# Altium PCB Drug Delivery CON_V113.PcbDoc (part 2 of 2)
Units mm, origin at the board's own origin, x right, y up, seen from the top; angles counter-clockwise.
Board outline 130.05 x 70.61 mm, 2 copper layers (Top Layer, Bottom Layer); 189 components, 131 nets, 618 pads, 110 vias.
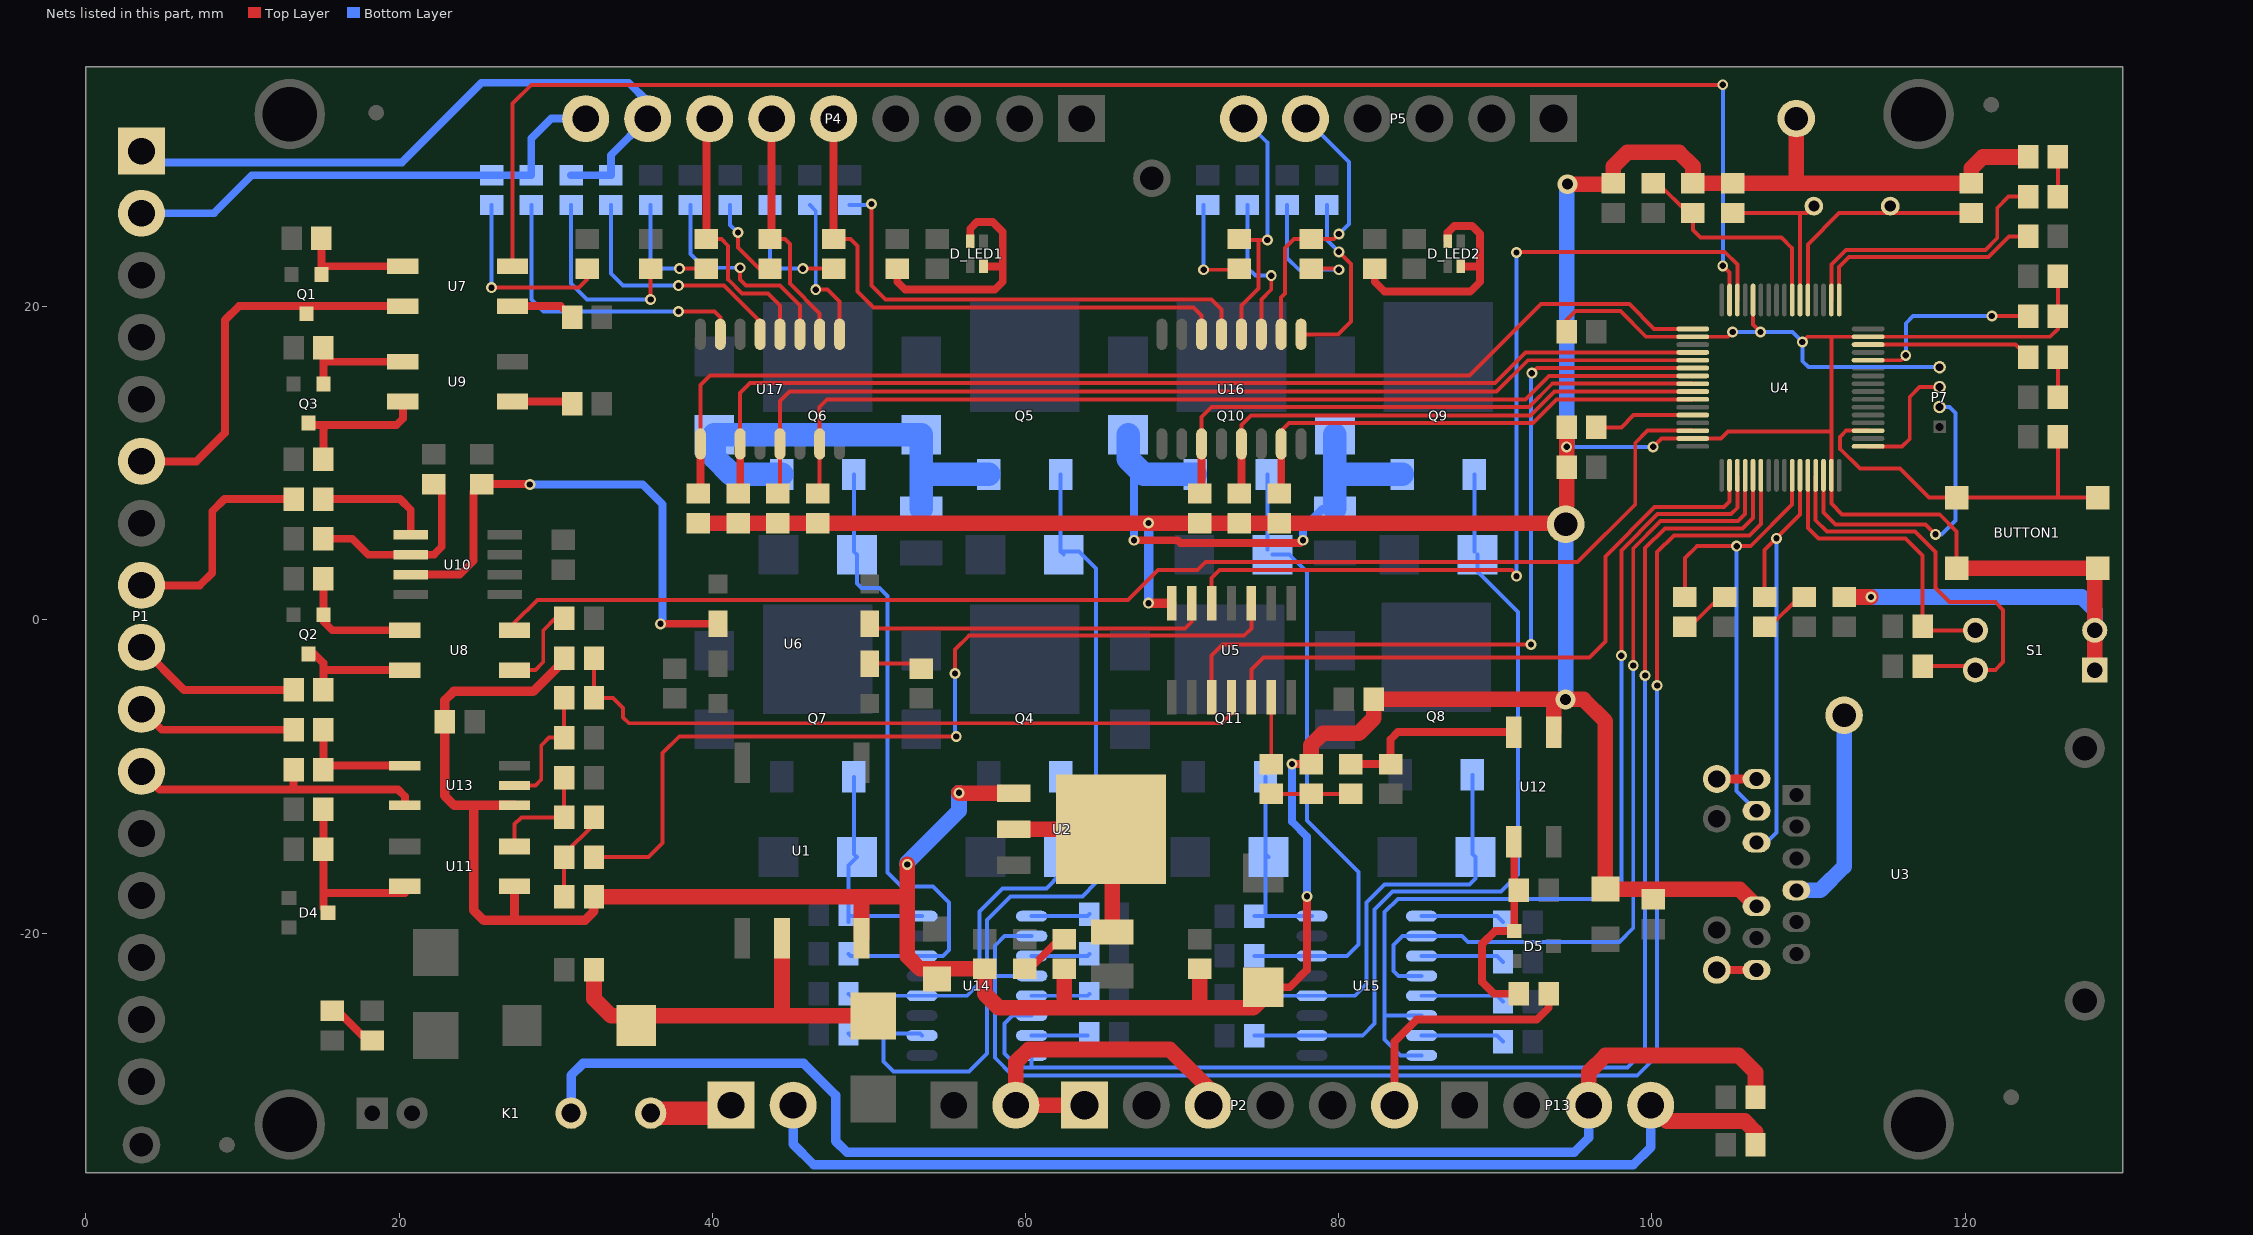
[diagram p2: the nets of this part, all layers, seen from the top]

## Via types
v1: diameter 0.7, hole 0.4, Top Layer to Bottom Layer, 89 vias
v2: diameter 1.27, hole 0.711, Top Layer to Bottom Layer, 10 vias
v3: diameter 1.27, hole 0.7, Top Layer to Bottom Layer, 9 vias
v4: diameter 3.4, hole 3.4, Top Layer to Bottom Layer, 2 vias

## Nets (pads, with @x,y where several pads share a name; then routed paths per layer and width w, separated by ;. In a path a pad name is that pad's centre, name@x,y a point inside that pad or via, vN(x,y) a via of type N, cw(c..) or ccw(c..) an arc to the next point about the centre after c; other vN are vias at no path point) (continued)
DC24V: K1.3 P13.3 R82.2 | length 89.5
  Top Layer w1: P13.3@95.96,-30.988 95.96,-28.881 97.028,-27.813 105.537,-27.813 106.614,-28.89 R82.2@106.614,-30.48
  Bottom Layer w0.6: K1.3@30.988,-31.496 30.988,-29.083 31.75,-28.321 45.847,-28.321 47.879,-30.353 47.879,-33.274 48.603,-33.998 95.034,-33.998 95.96,-33.072 P13.3@95.96,-30.988
DC24V0: P3.2 P13.4 R83.2 | length 69.2
  Top Layer w1: P13.4@99.92,-30.988 100.936,-32.004 105.918,-32.004 106.614,-32.7 R83.2@106.614,-33.528
  Bottom Layer w0.6: P3.2@45.16,-30.988 45.16,-33.476 46.482,-34.798 98.806,-34.798 99.92,-33.684 P13.4@99.92,-30.988
DOU-A: U4.35 U15.6 U15.8 | length 61.3
  Top Layer w0.254: v1(98.044,-2.286) 98.044,4.431 100.363,6.75 105.048,6.75 105.454,7.156 U4.35@105.454,9.224
  Bottom Layer w0.254: 82.931,-25.273 U15.6@85.288,-25.273 ; U15.8@85.288,-27.813 83.947,-27.813 82.931,-26.797 82.931,-18.669 83.785,-17.815 97.501,-17.815 98.044,-17.272 v1(98.044,-2.286)
DOU-B: U4.36 U15.2 U15.4 | length 54.4
  Top Layer w0.254: v1(98.806,-2.921) 98.806,4.551 100.551,6.296 105.483,6.296 105.954,6.767 U4.36@105.954,9.224
  Bottom Layer w0.254: U15.4@85.288,-22.733 83.82,-22.733 83.512,-22.425 83.512,-20.755 84.074,-20.193 87.884,-20.193 88.265,-20.574 97.917,-20.574 98.806,-19.685 v1(98.806,-2.921)
DOUSENSOR-CLOSE: LED9.2 P5.6 U16.4 | length 17
  Top Layer w0.254: LED9.2@73.66,24.318 73.721,24.257 v1(75.438,24.257) ; P5.6@73.66,31.744 P5.6@73.92,32.004 ; U16.4@73.787,18.232 73.787,20.066 74.867,21.145 74.867,24.194
  Bottom Layer w0.254: P5.6@73.92,32.004 75.438,30.486 v1(75.438,24.257)
DOUSENSOR-OPEN: LED8.2 P5.5 U16.2 | length 18.2
  Top Layer w0.254: U16.2@76.327,18.232 76.327,20.574 76.581,20.828 76.581,23.749 77.15,24.318 79.69,24.318 v1(80.01,24.638)
  Bottom Layer w0.254: P5.5@77.88,32.004 80.645,29.239 80.645,25.273 v1(80.01,24.638)
DS-CLOSE: R71.2 U4.25 U16.13 | length 33.9
  Top Layer w0.254: U16.13@73.787,11.232 73.787,12.446 74.387,13.046 92.247,13.046 93.775,14.574 U4.25@102.604,14.574
  Top Layer w0.5: R71.2@73.787,8.262 U16.13@73.787,11.232
DS-OPEN: R68.2 U4.26 U16.15 | length 33.4
  Top Layer w0.254: R68.2@76.327,8.189 76.327,12.065 76.835,12.573 92.416,12.573 93.917,14.074 U4.26@102.604,14.074
  Top Layer w0.5: 76.327,8.789 U16.15@76.327,11.232
EDM: U4.34 U5.12 | length 41.6
  Top Layer w0.254: U5.12@74.422,-4.94 74.422,-3.175 75.184,-2.413 96.012,-2.413 97.028,-1.397 97.028,4.057 100.175,7.204 104.613,7.204 104.954,7.545 U4.34@104.954,9.224
EDM-: P2.6 R41.2 | length 15.7
  Top Layer w0.5: P2.6@83.56,-30.988 83.56,-26.93 84.963,-25.527 92.644,-25.527 93.406,-24.765 R41.2@93.406,-23.876
"FEEDBACK PLUS": U4.22 U5.10 | length 51.1
  Top Layer w0.254: U5.10@71.882,-4.94 71.882,-2.286 72.59,-1.578 v1(92.275,-1.578) ; v1(92.329,15.748) 92.655,16.074 U4.22@102.604,16.074
  Bottom Layer w0.254: v1(92.275,-1.578) 92.275,15.694 v1(92.329,15.748)
GATE-A: U4.37 U14.6 U14.8 | length 88.8
  Top Layer w0.254: v1(99.568,-3.556) 99.568,4.572 100.838,5.842 105.791,5.842 106.454,6.505 U4.37@106.454,9.224
  Bottom Layer w0.254: U14.8@60.396,-27.813 60.396,-28.519 60.452,-28.575 ; U14.6@60.396,-25.273 59.182,-25.273 58.674,-25.781 58.674,-27.686 59.563,-28.575 98.425,-28.575 99.568,-27.432 v1(99.568,-3.556)
GATE-B: U4.38 U14.2 U14.4 | length 98
  Top Layer w0.254: v1(100.33,-4.191) 100.33,4.318 101.4,5.388 106.226,5.388 106.954,6.116 U4.38@106.954,9.224
  Bottom Layer w0.254: 58.039,-22.733 U14.4@60.396,-22.733 ; U14.2@60.396,-20.193 58.674,-20.193 58.039,-20.828 58.039,-27.94 59.182,-29.083 99.06,-29.083 100.33,-27.813 v1(100.33,-4.191)
GATESENSOR-CLOSE: LED6.2 P4.7 U17.4 | length 17.3
  Top Layer w0.254: LED6.2@39.624,24.318 40.579,24.318 41.021,23.876 41.021,21.717 41.91,20.828 43.561,20.828 44.323,20.066 U17.4@44.323,18.232
  Top Layer w0.5: LED6.2@39.624,24.318 39.624,31.796 P4.7@39.832,32.004
GATESENSOR-OPEN: LED7.2 P4.6 U17.2 | length 15.8
  Top Layer w0.254: LED7.2@43.688,24.318 44.643,24.318 44.958,24.003 44.958,21.463 46.863,19.558 U17.2@46.863,18.232
  Top Layer w0.5: LED7.2@43.688,24.318 43.792,24.422 P4.6@43.792,32.004
  Bottom Layer w0.5: P4.6@43.688,31.9 P4.6@43.792,32.004
GND: BUTTON1.3 BUTTON1.4 C3.2 C4.1 C5.2 C6.1 C7.2 C8.1 C9.1 C10.1 C11.1 C12.1 C13.1 C14.1 C15.1 C16.1 C19.1 C20.2 C21.2 C22.2 C23.2 LED1.2 LED4.2 P7.4 PT3.1 PT4.1 R10.1 R12.1 R62.1 R65.1 R68.1 R71.1 R74.1 R77.1 R80.1 S1.1 S1.2 U1.4 U2.1 U3.10 U4.12 U4.18 U4.31 U4.47 U4.63 U5.7 U11.3 U12.3 U13.4 | length 423.7
  Top Layer w0.254: C13.1@94.554,18.38 94.554,19.135 95.123,19.704 97.99,19.704 99.62,18.074 104.85,18.074 v1(105.156,18.38) ; v1(100.076,11.049) 100.601,11.574 104.394,11.574 104.85,12.03 111.454,12.03 ; U4.12@106.454,20.424 106.454,18.86 v1(106.934,18.38) ; v1(109.601,17.745) 109.93,18.074 125.424,18.074 125.918,18.568 C15.1@125.918,21.936 ; 111.454,17.999 111.454,7.418 112.141,6.731 118.375,6.731 119.452,5.654 BUTTON1.3@119.452,3.299
  Top Layer w0.5: C5.2@75.184,-23.462 76.868,-23.462 77.978,-22.352 v1(77.978,-17.653) ; v1(77.023,-9.21) C22.2@78.232,-9.21
  Top Layer w0.6: 24.765,-11.846 24.765,-18.542 25.4,-19.177 31.877,-19.177 32.446,-18.608 C21.2@32.446,-17.688 ; 27.305,-19.177 27.376,-19.106 U11.3@27.376,-17.018 ; U13.4@27.376,-11.846 23.53,-11.846 22.926,-11.242 22.926,-5.141 23.495,-4.572 28.575,-4.572 30.546,-2.601 C20.2@30.546,-2.448 ; v1(67.862,1.06) U5.7@69.342,1.06
  Top Layer w1: C21.2@32.446,-17.688 52.451,-17.688 ; R77.1@39.116,6.162 PT4.1@94.422,6.162 ; U1.4@49.53,-20.332 49.53,-17.688 ; v1(52.451,-15.621) 52.451,-21.463 53.274,-22.286 C4.1@57.404,-22.286 57.404,-23.876 58.293,-24.765 74.549,-24.765 75.184,-24.13 C5.2@75.184,-23.462 ; v1(55.753,-11.049) 55.774,-11.07 U2.1@59.257,-11.07 ; 62.484,-24.765 LED1.2@62.484,-22.286 ; 71.12,-24.765 C6.1@71.12,-22.286 ; C22.2@78.232,-9.21 78.232,-8.001 78.994,-7.239 81.28,-7.239 82.23,-6.289 C19.1@82.23,-5.08 95.631,-5.08 97.028,-6.477 C7.2@97.028,-17.196 105.588,-17.196 U3.10@106.68,-18.288 ; U12.3@93.726,-7.168 93.726,-5.588 ; 94.554,7.305 R12.1@94.554,12.284 ; v3(94.615,27.813) 97.475,27.813 C9.1@97.536,27.874 97.536,28.956 98.425,29.845 101.727,29.845 102.616,28.956 C16.1@102.616,27.874 C10.1@120.396,27.874 120.396,28.829 121.123,29.556 LED4.2@124.018,29.556 ; 109.22,27.874 PT3.1@109.22,32.004 ; C14.1@112.268,1.458 v1(113.98,1.458) ; BUTTON1.3@119.452,3.299 BUTTON1.4@128.452,3.299 128.27,3.117 S1.1@128.27,-3.21
  Bottom Layer w0.254: v1(94.554,11.049) v1(100.076,11.049) ; v1(105.156,18.38) 108.966,18.38 v1(109.601,17.745) 109.601,16.51 109.982,16.129 P7.4@118.364,16.129
  Bottom Layer w0.5: v1(77.023,-9.21) 77.023,-12.888 77.978,-13.843 v1(77.978,-17.653)
  Bottom Layer w0.6: v1(67.862,1.06) v1(67.862,6.179)
  Bottom Layer w1: v1(52.451,-15.621) 52.451,-15.494 55.753,-12.192 v1(55.753,-11.049) ; v3(94.488,-5.08) PT4.1@94.488,6.096 ; v1(94.554,11.049) 94.554,27.752 v3(94.615,27.813) ; v1(113.98,1.458) 127.447,1.458 128.27,0.635 S1.2@128.27,-0.67
GS-CLOSE: R62.2 U4.21 U17.13 | length 65.3
  Top Layer w0.254: R62.2@44.196,8.062 44.323,8.189 44.323,13.97 44.923,14.57 90.071,14.57 92.075,16.574 U4.21@102.604,16.574
GS-OPEN: R65.2 U4.23 U17.15 | length 62.1
  Top Layer w0.254: R65.2@46.736,8.062 46.863,8.189 U17.15@46.863,11.232 46.863,13.589 47.336,14.062 91.913,14.062 93.425,15.574 U4.23@102.604,15.574
NetBUTTON1_1: BUTTON1.1 BUTTON1.2 R5.2 U4.51 | length 24.3
  Top Layer w0.254: U4.51@113.804,12.074 112.404,12.074 112.014,11.684 112.014,10.922 113.284,9.652 115.824,9.652 117.677,7.799 BUTTON1.2@128.452,7.799 ; 125.918,7.86 R5.2@125.918,11.684
NetC1_1: C1.1 C2.1 D1.2 U1.2 | length 25.1
  Top Layer w1: C2.1@32.446,-22.352 32.446,-24.191 33.545,-25.29 D1.2@50.292,-25.29 ; 44.45,-25.29 U1.2@44.45,-20.332
NetC20_1: C20.1 R30.1 U5.11 | length 45.6
  Top Layer w0.254: C20.1@32.446,-2.448 R30.1@32.446,-4.988 33.655,-4.988 34.29,-5.623 34.29,-6.223 34.671,-6.604 72.517,-6.604 73.152,-5.969 U5.11@73.152,-4.94
NetC21_1: C21.1 R28.2 R31.1 | length 5.9
  Top Layer w0.254: C21.1@30.546,-17.688 30.546,-14.955 32.446,-13.055 R31.1@32.446,-12.608
NetC22_1: C22.1 R29.2 R32.1 | length 5.1
  Top Layer w0.254: R29.2@75.692,-11.11 R32.1@80.772,-11.11
NetD3_2: D3.2 U4.1 | length 15
  Top Layer w0.254: U4.1@111.954,20.424 111.954,22.539 112.583,23.168 121.501,23.168 122.809,24.476 D3.2@124.018,24.476
NetD4_3: D4.3 R37.2 R40.1 U11.2 | length 11.9
  Top Layer w0.5: 15.174,-17.434 U11.2@20.376,-17.434 ; R40.1@15.174,-12.1 15.174,-18.404 D4.3@15.474,-18.704
NetD5_1: D5.1 R38.1 R41.1 U12.1 | length 13.2
  Top Layer w0.5: U12.1@91.186,-14.168 91.206,-14.188 D5.1@91.206,-19.878 89.977,-19.878 89.154,-20.701 89.154,-23.114 89.916,-23.876 R41.1@91.506,-23.876
NetD6_2: D6.2 D8.2 F2.1 Q5.3 Q6.3 | length 28.5
  Bottom Layer w1.5: Q6.3@44.436,9.284 41.227,9.284 40.132,10.379 D8.2@40.132,11.816 D6.2@53.34,11.816 F2.1@53.34,7.08 ; 53.34,9.236 53.388,9.284 Q5.3@57.644,9.284
NetD10_2: D10.2 D12.2 F3.1 Q9.3 Q10.3 | length 34.9
  Top Layer w0.5: v1(66.929,5.08) 69.723,5.08 69.908,4.895 77.539,4.895 v1(77.724,5.08)
  Bottom Layer w0.5: D12.2@66.548,11.816 D12.2@66.929,11.435 ; v1(66.929,5.08) 66.929,9.871 ; v1(77.724,5.08) 77.724,5.842 78.962,7.08 F3.1@79.756,7.08
  Bottom Layer w1.5: D12.2@66.548,11.816 66.548,10.287 67.551,9.284 Q10.3@70.852,9.284 ; F3.1@79.756,7.08 D10.2@79.756,11.816 ; 79.756,9.236 79.804,9.284 Q9.3@84.06,9.284
NetD_LED1_2: D_LED1.2 D_LED1.4 R46.2 | length 15.7
  Top Layer w0.5: R46.2@51.816,22.418 51.816,21.59 52.324,21.082 58.039,21.082 58.547,21.59 58.547,24.765 57.912,25.4 56.896,25.4 56.471,24.975 D_LED1.4@56.471,24.168 ; D_LED1.2@57.321,22.568 58.509,22.568
NetD_LED2_2: D_LED2.2 D_LED2.4 R55.2 | length 15.3
  Top Layer w0.5: R55.2@82.296,22.418 82.296,21.59 82.931,20.955 88.392,20.955 89.027,21.59 89.027,24.638 88.519,25.146 87.376,25.146 86.951,24.721 D_LED2.4@86.951,24.168 ; D_LED2.2@87.801,22.568 88.938,22.568
NetF1_1: F1.1 pad.1 U2.2 U2.4 | length 12.8
  Top Layer w1: U2.2@59.257,-13.37 U2.4@65.457,-13.37 65.532,-13.445 F1.1@65.532,-19.936
NetK1_4: K1.4 P3.1 | length 5.3
  Top Layer w1.5: K1.4@36.068,-31.496 40.692,-31.496 P3.1@41.2,-30.988
NetLED1_1: LED1.1 R1.2 | length 3.3
  Top Layer w0.5: R1.2@59.944,-22.286 60.264,-22.286 62.164,-20.386 LED1.1@62.484,-20.386
NetLED2_1: LED2.1 R2.1 | length 3.3
  Top Layer w0.254: LED2.1@102.108,-0.442 102.428,-0.442 104.328,1.458 R2.1@104.648,1.458
NetLED3_1: LED3.1 R3.1 | length 3.3
  Top Layer w0.254: LED3.1@107.188,-0.442 107.508,-0.442 109.408,1.458 R3.1@109.728,1.458
NetLED4_1: LED4.1 R11.1 | length 2.5
  Top Layer w0.254: R11.1@125.918,27.016 LED4.1@125.918,29.556
NetLED5_1: LED5.1 R78.1 | length 7.8
  Top Layer w0.254: v1(45.786,22.418) LED5.1@47.752,22.418
  Bottom Layer w0.254: R78.1@43.688,26.482 43.688,22.987 44.257,22.418 v1(45.786,22.418)
NetLED6_1: LED6.1 R60.2 | length 7.3
  Top Layer w0.254: v1(37.907,22.418) LED6.1@39.624,22.418
  Bottom Layer w0.254: R60.2@36.068,26.482 36.068,22.987 36.637,22.418 v1(37.907,22.418)
NetLED7_1: LED7.1 R63.2 | length 5.5
  Top Layer w0.254: v1(41.641,24.724) 41.641,23.764 42.987,22.418 LED7.1@43.688,22.418
  Bottom Layer w0.254: R63.2@41.148,26.482 41.148,25.217 v1(41.641,24.724)
NetLED8_1: LED8.1 R66.2 | length 8.8
  Top Layer w0.254: LED8.1@78.232,22.418 79.944,22.418 v1(80.01,22.352)
  Bottom Layer w0.254: R66.2@76.708,26.482 76.708,23.114 77.47,22.352 v1(80.01,22.352)
NetLED9_1: LED9.1 R69.2 | length 6.4
  Top Layer w0.254: v1(71.374,22.352) 73.594,22.352 LED9.1@73.66,22.418
  Bottom Layer w0.254: v1(71.374,22.352) R69.2@71.374,26.482
NetLED10_1: LED10.1 R72.2 | length 12.5
  Top Layer w0.254: v1(36.068,20.447) LED10.1@36.068,22.418
  Bottom Layer w0.254: R72.2@30.988,26.482 30.988,21.463 32.004,20.447 v1(36.068,20.447)
NetLED11_1: LED11.1 R75.2 | length 12.3
  Top Layer w0.254: v1(25.908,21.209) 31.496,21.209 32.004,21.717 LED11.1@32.004,22.418 ; LED11.1@31.877,22.418 LED11.1@31.877,22.479
  Bottom Layer w0.254: v1(25.908,21.209) R75.2@25.908,26.482
NetLED12_1: LED12.1 R81.2 | length 3.3
  Top Layer w0.5: LED12.1@15.748,-24.958 16.068,-24.958 17.968,-26.858 R81.2@18.288,-26.858
NetLED13_1: LED13.1 R4.2 | length 2.5
  Top Layer w0.254: R4.2@125.918,14.224 LED13.1@125.918,16.764
NetLED13_2: LED13.2 U4.62 | length 10.5
  Top Layer w0.254: U4.62@113.804,17.574 123.208,17.574 LED13.2@124.018,16.764
NetPT5_1: PT5.1 U3.4 | length 13.3
  Bottom Layer w1: U3.4@109.22,-17.272 110.744,-17.272 112.268,-15.748 PT5.1@112.268,-6.096
NetQ1_1: Q1.1 R19.2 U7.3 | length 7.5
  Top Layer w0.5: Q1.1@15.047,22.043 R19.2@15.047,24.349 ; 15.047,22.571 U7.3@20.249,22.571
NetQ2_1: Q2.1 R20.1 U8.3 | length 8.2
  Top Layer w0.5: R20.1@15.174,2.632 15.174,-0.096 15.748,-0.67 U8.3@20.376,-0.67
NetQ2_3: Q2.3 R23.1 U8.4 | length 8.2
  Top Layer w0.5: Q2.3@14.224,-2.174 14.585,-2.174 15.174,-2.763 R23.1@15.174,-4.48 ; 15.174,-3.083 15.301,-3.21 U8.4@20.376,-3.21
NetQ3_1: Q3.1 R21.1 U9.3 | length 7.5
  Top Layer w0.5: Q3.1@15.047,14.931 Q3.1@15.047,15.058 ; Q3.1@15.174,15.058 R21.1@15.174,17.364 ; 15.174,16.475 U9.3@20.249,16.475
NetQ3_3: Q3.3 R24.1 U9.4 | length 9.8
  Top Layer w0.5: Q3.3@14.097,12.431 19.832,12.431 20.249,12.848 U9.4@20.249,13.935 ; R24.1@15.047,10.125 R24.1@15.047,10.252 ; R24.1@15.174,10.252 15.174,12.238 15.367,12.431
NetQ4_1: Q4.1 R45.1 U14.12 Z2.2 | length 25.7
  Bottom Layer w0.254: R45.1@48.702,-23.876 48.829,-24.003 56.261,-24.003 57.077,-23.187 57.077,-18.615 58.547,-17.145 61.341,-17.145 62.244,-16.242 Q4.1@62.244,-10.02
NetQ5_1: Q5.1 R44.1 U14.10 Z1.1 | length 58.5
  Bottom Layer w0.254: R44.1@48.829,-26.543 R44.1@48.702,-26.416 53.269,-26.416 U14.10@53.396,-26.543 ; 50.927,-26.416 50.927,-28.194 51.562,-28.829 56.388,-28.829 57.531,-27.686 57.531,-19.177 59.055,-17.653 63.627,-17.653 64.516,-16.764 64.516,3.267 63.427,4.356 Z1.1@62.244,4.356 ; Q5.1@62.244,9.284 Z1.1@62.244,4.356 ; Z1.1@62.444,4.156 Z1.1@62.244,4.356
NetQ6_1: Q6.1 R47.1 U14.14 Z3.1 | length 41.4
  Bottom Layer w0.254: R47.1@48.702,-21.336 48.829,-21.463 U14.14@53.396,-21.463 54.737,-21.463 55.118,-21.082 55.118,-18.034 54.102,-17.018 52.07,-17.018 51.181,-16.129 51.181,1.524 50.673,2.032 49.53,2.032 49.236,2.326 Z3.1@49.236,4.156 49.036,4.356 Q6.1@49.036,9.284
NetQ7_1: Q7.1 R48.1 U14.16 Z4.2 | length 14.2
  Bottom Layer w0.254: R48.1@48.702,-19.304 R48.1@48.702,-18.923 ; Q7.1@49.036,-10.02 49.036,-14.948 Z4.2@49.236,-15.148 48.702,-15.682 R48.1@48.702,-18.796 48.829,-18.923 U14.16@53.396,-18.923
NetQ8_1: Q8.1 R54.1 U15.12 Z6.2 | length 27
  Bottom Layer w0.254: R54.1@74.61,-24.003 81.026,-24.003 81.788,-23.241 81.788,-18.034 82.931,-16.891 88.352,-16.891 88.733,-16.51 Z6.2@88.733,-15.148 88.533,-14.948 Q8.1@88.533,-9.893
NetQ9_1: Q9.1 R53.1 U15.10 Z5.1 | length 51.8
  Bottom Layer w0.254: R53.1@74.61,-26.543 81.534,-26.543 82.296,-25.781 82.296,-18.488 83.439,-17.345 90.351,-17.345 91.44,-16.256 91.44,0.508 88.86,3.088 Z5.1@88.86,4.156 ; Z5.1@88.66,4.356 Q9.1@88.66,9.284
NetQ10_1: Q10.1 R56.1 U15.14 Z7.1 | length 39.5
  Bottom Layer w0.254: R56.1@74.61,-21.463 80.518,-21.463 81.261,-20.72 81.261,-16.11 77.978,-12.827 77.978,3.048 76.87,4.156 Z7.1@75.779,4.156 ; Z7.1@75.452,4.483 Q10.1@75.452,9.284
NetQ11_1: Q11.1 R57.1 U15.16 Z8.2 | length 12.8
  Bottom Layer w0.254: R57.1@74.61,-18.923 U15.16@78.288,-18.923 ; 75.325,-18.81 Q11.1@75.325,-10.02 ; Z8.2@75.325,-14.948 Z8.2@75.525,-15.148
NetR10_2: R10.2 U4.60 | length 12.6
  Top Layer w0.254: U4.60@113.804,16.574 115.888,16.574 v1(116.205,16.891) ; v1(121.701,19.396) R10.2@124.018,19.396
  Bottom Layer w0.254: v1(116.205,16.891) 116.205,18.923 116.678,19.396 v1(121.701,19.396)
NetR11_2: R11.2 U4.2 | length 17.7
  Top Layer w0.254: U4.2@111.454,20.424 111.454,22.681 112.395,23.622 121.285,23.622 122.047,24.384 122.047,26.289 122.774,27.016 R11.2@124.018,27.016
NetR12_2: R12.2 U4.28 | length 6.5
  Top Layer w0.254: R12.2@96.454,12.284 98.044,12.284 98.834,13.074 U4.28@102.604,13.074
NetR13_2: R13.2 S1.3 U4.45 | length 27.3
  Top Layer w0.254: U4.45@110.454,9.224 110.454,6.358 111.17,5.642 116.786,5.642 118.11,4.318 118.11,2.032 118.999,1.143 121.92,1.143 122.428,0.635 122.428,-2.702 121.92,-3.21 S1.3@120.65,-3.21 120.396,-2.956 R13.2@117.282,-2.956
NetR14_2: R14.2 S1.4 U4.44 | length 19.6
  Top Layer w0.254: U4.44@109.954,9.224 109.954,5.87 110.636,5.188 116.189,5.188 117.282,4.095 117.282,-0.67 S1.4@120.65,-0.67
NetR15_1: R15.1 U7.1 | length 4.1
  Top Layer w0.5: U7.1@27.249,20.031 30.327,20.031 R15.1@31.054,19.304
NetR16_2: R16.2 U6.2 | length 3.4
  Top Layer w0.254: U6.2@50.062,-2.794 53.02,-2.794 R16.2@53.34,-3.114
NetR17_2: R17.2 U8.1 | length 5.7
  Top Layer w0.254: U8.1@27.376,-3.21 28.702,-3.21 29.21,-2.702 29.21,-0.67 29.972,0.092 R17.2@30.546,0.092
NetR18_2: R18.2 U9.1 | length 3.9
  Top Layer w0.5: U9.1@27.249,13.935 30.927,13.935 R18.2@31.054,13.808
NetR22_2: R22.2 U6.6 U10.3 | length 32.9
  Top Layer w0.5: U10.3@20.749,2.886 23.876,2.886 24.765,3.775 24.765,8.159 R22.2@25.273,8.667 28.321,8.667 v1(28.352,8.636) ; v1(36.703,-0.254) U6.6@40.362,-0.254
  Bottom Layer w0.5: v1(28.352,8.636) 35.56,8.636 36.83,7.366 36.83,-0.127 v1(36.703,-0.254)
NetR25_1: R25.1 R26.2 U10.2 | length 12.4
  Top Layer w0.5: R26.2@15.174,5.172 17.018,5.172 18.034,4.156 22.225,4.156 22.733,4.664 22.733,8.159 R25.1@22.225,8.667
NetR27_1: R27.1 U10.1 | length 7.5
  Top Layer w0.5: R27.1@15.174,7.712 20.066,7.712 20.749,7.029 U10.1@20.749,5.426
NetR28_1: R28.1 U5.3 | length 56.4
  Top Layer w0.254: R28.1@32.446,-15.148 35.941,-15.148 36.83,-14.259 36.83,-8.509 37.893,-7.446 v1(55.579,-7.446) ; v1(55.499,-3.429) 55.499,-1.905 56.388,-1.016 73.949,-1.016 74.422,-0.543 U5.3@74.422,1.06
  Bottom Layer w0.254: v1(55.499,-3.429) 55.499,-7.366 v1(55.579,-7.446)
NetR29_1: R29.1 U5.13 | length 4.3
  Top Layer w0.254: R29.1@75.692,-9.21 U5.13@75.692,-4.94
NetR30_2: R30.2 R33.2 U13.5 | length 8.2
  Top Layer w0.254: U13.5@27.376,-10.576 28.702,-10.576 29.083,-10.195 29.083,-8.036 29.591,-7.528 R33.2@30.546,-7.528 R30.2@30.546,-4.988
NetR31_2: R31.2 R34.2 U11.4 | length 7.3
  Top Layer w0.254: U11.4@27.376,-14.478 27.376,-13.045 27.813,-12.608 R31.2@30.546,-12.608 R34.2@30.546,-10.068
NetR32_2: R32.2 R35.2 U12.4 | length 12.6
  Top Layer w0.5: R32.2@80.772,-9.21 R35.2@83.312,-9.21 83.312,-7.62 83.764,-7.168 U12.4@91.186,-7.168 91.186,-7.208 U12.4@90.932,-6.954
NetR36_1: R36.1 R39.1 U13.1 | length 7.7
  Top Layer w0.5: R36.1@15.174,-9.56 R39.1@15.174,-7.02 ; R36.1@15.174,-9.306 U13.1@20.376,-9.306
NetR42_2: R42.2 U14.7 | length 3.6
  Bottom Layer w0.254: U14.7@60.396,-26.543 R42.2@63.947,-26.543
NetR43_2: R43.2 U14.5 | length 3.7
  Bottom Layer w0.254: U14.5@60.396,-24.003 63.947,-24.003 R43.2@64.074,-23.876
NetR49_1: R49.1 U14.3 | length 3.7
  Bottom Layer w0.254: U14.3@60.396,-21.463 63.947,-21.463 R49.1@64.074,-21.336
NetR50_1: R50.1 U14.1 | length 3.7
  Bottom Layer w0.254: U14.1@60.396,-18.923 63.947,-18.923 R50.1@64.074,-18.796
NetR51_2: R51.2 U15.7 | length 5.4
  Bottom Layer w0.254: U15.7@85.288,-26.543 90.109,-26.543 R51.2@90.49,-26.924
NetR52_1: R52.1 U15.5 | length 5.4
  Bottom Layer w0.254: U15.5@85.288,-24.003 90.109,-24.003 R52.1@90.49,-24.384
NetR58_2: R58.2 U15.3 | length 5.4
  Bottom Layer w0.254: U15.3@85.288,-21.463 90.109,-21.463 R58.2@90.49,-21.844
NetR59_1: R59.1 U15.1 | length 5.4
  Bottom Layer w0.254: U15.1@85.288,-18.923 90.109,-18.923 R59.1@90.49,-19.304
NetR61_2: R61.2 U17.3 | length 13.7
  Top Layer w0.254: v1(41.783,22.479) 41.783,21.717 42.164,21.336 44.323,21.336 45.593,20.066 U17.3@45.593,18.232
  Bottom Layer w0.254: R61.2@38.608,26.482 38.608,23.368 39.497,22.479 v1(41.783,22.479)
NetR64_2: R64.2 U17.1 | length 9.5
  Top Layer w0.254: v1(46.609,21.082) 47.371,21.082 48.133,20.32 U17.1@48.133,18.232
  Bottom Layer w0.254: R64.2@46.228,26.482 46.609,26.101 v1(46.609,21.082)
NetR67_2: R67.2 U16.1 | length 11.6
  Top Layer w0.254: U16.1@77.597,18.232 79.954,18.232 80.772,19.05 80.772,22.733 v1(80.01,23.495)
  Bottom Layer w0.254: R67.2@79.248,26.482 79.248,24.257 v1(80.01,23.495)
NetR70_2: R70.2 U16.3 | length 9.7
  Top Layer w0.254: U16.3@75.057,18.232 75.057,20.444 75.692,21.079 v1(75.692,21.971)
  Bottom Layer w0.254: R70.2@74.168,26.482 74.168,22.479 74.676,21.971 v1(75.692,21.971)
NetR73_1: R73.1 U17.5 | length 16
  Top Layer w0.254: v1(37.846,21.336) 40.76,21.336 43.053,19.043 U17.5@43.053,18.232
  Bottom Layer w0.254: R73.1@33.528,26.482 33.528,22.098 34.29,21.336 v1(37.846,21.336)
NetR76_1: R76.1 U17.7 | length 19.6
  Top Layer w0.254: v1(37.846,19.685) 40.132,19.685 40.513,19.304 U17.7@40.513,18.232
  Bottom Layer w0.254: R76.1@28.448,26.482 28.448,20.447 29.21,19.685 v1(37.846,19.685)
NetR79_2: R79.2 U16.5 | length 31.2
  Top Layer w0.254: v1(50.165,26.543) 50.165,21.336 51.054,20.447 71.882,20.447 72.517,19.812 U16.5@72.517,18.232
  Bottom Layer w0.254: R79.2@48.768,26.482 50.104,26.482 v1(50.165,26.543)
NetU3_7: U3.7 U3.13 | length 2.5
  Top Layer w0.6: U3.13@104.14,-10.16 U3.7@106.68,-10.16
NetU3_12: U3.12 U3.16 | length 2.5
  Top Layer w0.5: U3.16@104.14,-22.352 U3.12@106.68,-22.352
NetU5_6: U5.6 U6.3 | length 22
  Top Layer w0.254: U6.3@50.062,-0.254 50.165,-0.254 50.473,-0.562 70.177,-0.562 70.612,-0.127 U5.6@70.612,1.06
OA+: P1.10 R39.2 | length 10.3
  Top Layer w0.5: P1.10@3.556,-5.721 4.855,-7.02 R39.2@13.274,-7.02
OA-: P1.11 R36.2 U13.3 | length 19.4
  Top Layer w0.5: P1.11@3.556,-9.681 4.705,-10.83 19.939,-10.83 20.376,-11.267 U13.3@20.376,-11.846 ; 13.208,-10.83 13.274,-10.764 R36.2@13.274,-9.56
OPPOSITE: R80.2 U4.24 U16.11 | length 37.2
  Top Layer w0.254: U16.11@71.247,11.176 71.247,12.954 71.882,13.589 92.148,13.589 93.633,15.074 U4.24@102.604,15.074
  Top Layer w0.5: R80.2@71.12,8.062 71.247,8.189 U16.11@71.247,11.232
OPPOSITESENSOR: LED5.2 P4.5 U16.6 | length 36.1
  Top Layer w0.254: LED5.2@47.752,24.318 48.834,24.318 49.276,23.876 49.276,20.955 50.292,19.939 70.739,19.939 71.247,19.431 U16.6@71.247,18.232
  Top Layer w0.5: LED5.2@47.752,24.318 P4.5@47.752,32.004
OSCIN1: C10.2 U4.5 Y1.1 | length 14.8
  Top Layer w0.254: U4.5@109.954,20.424 109.954,23.975 111.953,25.974 C10.2@120.396,25.974
OSCOUT1: C11.2 U4.6 Y1.2 | length 10.9
  Top Layer w0.254: C11.2@105.156,25.974 109.894,25.974 Y1.2@110.336,26.416 ; U4.6@109.454,20.424 109.454,25.954
PULS: U4.14 U5.5 | length 58.9
  Top Layer w0.254: U5.5@71.882,1.06 71.882,2.667 72.39,3.175 91.059,3.175 v1(91.35,2.787) ; v1(91.35,23.458) 91.387,23.495 104.648,23.495 105.454,22.689 U4.14@105.454,20.424
  Bottom Layer w0.254: v1(91.35,2.787) v1(91.35,23.458)
PULS2: P1.8 R27.2 | length 14.3
  Top Layer w0.5: P1.8@3.556,2.199 7.279,2.199 8.075,2.995 8.075,6.932 8.855,7.712 R27.2@13.274,7.712
RESET: C16.2 R9.2 U4.7 | length 14.5
  Top Layer w0.254: R9.2@100.076,27.874 100.396,27.874 102.296,25.974 C16.2@102.616,25.974 102.616,24.892 103.105,24.403 108.277,24.403 108.954,23.726 U4.7@108.954,20.424
RESETSENSOR: P1.2 P4.9 R75.1 R76.2 | length 32.2
  Bottom Layer w0.5: P1.2@3.556,25.959 8.179,25.959 10.602,28.382 R76.2@28.448,28.382 28.448,30.734 29.718,32.004 P4.9@31.912,32.004
RST: R77.2 U4.17 U17.9 | length 73.1
  Top Layer w0.254: U17.9@39.243,11.832 39.243,14.986 39.843,15.586 88.357,15.586 92.929,20.158 98.552,20.158 100.136,18.574 U4.17@102.604,18.574
  Top Layer w0.5: R77.2@39.116,8.062 39.243,8.189 U17.9@39.243,11.832
SF1+: P2.1 P2.3 P6.2 | length 22.8
  Top Layer w0.5: P2.3@71.247,-30.988 P2.3@71.68,-30.988
  Top Layer w1: P2.1@63.76,-30.988 P6.2@59.384,-30.988 59.384,-28.246 60.198,-27.432 69.215,-27.432 71.68,-29.897 P2.3@71.68,-30.988
  Bottom Layer w1: P6.2@59.384,-30.988 P6.2@59.384,-30.455
SIGN: U4.30 U8.2 | length 83.1
  Top Layer w0.254: U8.2@27.376,-0.67 27.376,-0.183 28.829,1.27 66.548,1.27 68.453,3.175 70.993,3.175 71.501,3.683 95.25,3.683 98.933,7.366 98.933,11.303 99.704,12.074 U4.30@102.604,12.074
SIGN2: P1.9 R23.2 | length 10.8
  Top Layer w0.5: P1.9@3.556,-1.761 6.275,-4.48 R23.2@13.274,-4.48
SON: U4.15 U7.2 | length 102.1
  Top Layer w0.254: U7.2@27.249,22.571 27.249,32.964 28.448,34.163 v1(104.521,34.163) ; v1(104.521,22.606) 104.954,22.173 U4.15@104.954,20.424
  Bottom Layer w0.254: v1(104.521,22.606) v1(104.521,34.163)
SRV-ON: P1.6 Q1.3 U7.4 | length 25
  Top Layer w0.5: P1.6@3.556,10.119 7.071,10.119 8.89,11.938 8.89,19.142 9.779,20.031 U7.4@20.249,20.031
TCK/SWCLK: P7.3 U4.49 | length 7.7
  Top Layer w0.254: U4.49@113.804,11.074 115.976,11.074 116.459,11.557 116.459,14.224 117.094,14.859 P7.3@118.364,14.859
TMS/SWDIO: P7.2 U4.46 | length 19.8
  Top Layer w0.254: U4.46@110.954,9.224 110.954,6.858 111.716,6.096 117.475,6.096 v1(118.11,5.461)
  Bottom Layer w0.254: v1(118.11,5.461) 118.491,5.461 119.38,6.35 119.38,13.208 118.999,13.589 P7.2@118.364,13.589
TOP: R74.2 U4.20 U17.11 | length 68.4
  Top Layer w0.254: U17.11@41.783,11.832 41.783,14.478 42.418,15.113 89.972,15.113 91.933,17.074 U4.20@102.604,17.074
  Top Layer w0.5: R74.2@41.656,8.062 41.783,8.189 U17.11@41.783,11.832
TOPSENSOR: P1.1 P4.8 R72.1 R73.2 | length 43.4
  Bottom Layer w0.5: P1.1@3.556,29.919 4.265,29.21 20.193,29.21 25.273,34.29 34.671,34.29 35.872,33.089 P4.8@35.872,32.004 33.528,29.66 R73.2@33.528,28.382 R72.1@30.988,28.382
USART_RX1: LED3.2 U3.9 U4.43 | length 29
  Top Layer w0.254: LED3.2@107.188,1.458 107.188,4.445 109.454,6.711 U4.43@109.454,9.224
  Bottom Layer w0.254: U3.9@106.68,-14.224 107.315,-14.224 107.95,-13.589 v1(107.95,5.207)
USART_TX1: LED2.2 U3.8 U4.42 | length 30
  Top Layer w0.254: LED2.2@102.108,1.458 102.108,3.937 102.87,4.699 106.299,4.699 108.954,7.354 U4.42@108.954,9.224
  Bottom Layer w0.254: v1(105.41,4.699) 105.41,-10.922 U3.8@106.68,-12.192
pads on no net: D4.2 D5.2 U1.8 U3.1 U3.2 U3.3 U3.5 U3.6 U3.17 U4.3 U4.4 U4.8 U4.9 U4.10 U4.11 U4.27 U4.29 U4.39 U4.40 U4.41 U4.50 U4.52 U4.53 U4.54 U4.55 U4.56 U4.57 U4.58 U4.59 U4.61 U5.1 U5.2 U5.8 U5.9 U6.1 U6.4 U10.7 U16.7 U16.8 U16.9 U16.10
copper on no net:
  other v4: 124.46,-22.606 124.46,-9.906

## Polygon pours and split planes (outlines as drawn)
24V0 on Bottom Layer "GND" (solid, remove dead copper, pour order 1000): 0.254,35.052 0.254,-35.052 101.6,-35.052 101.6,35.052

## Silkscreen, mask and mechanical layers (free items; w line width, h text height)
Top Overlay:
  circle w0.254: c18.542,32.385 r1.5
  circle w0.254: c9.017,-33.528 r1.5
  circle w0.254: c122.936,-30.48 r1.5
  circle w0.254: c121.666,32.893 r1.5
  text "TOP" at 8.636,29.464 h0.8
  text "B2" at 81.153,26.416 h0.8
  text "RST" at 30.988,26.289 h0.8
  text "TOP" at 34.925,26.289 h0.8
  text "DOWN" at 38.481,26.289 h0.8
  text "UP" at 43.18,26.289 h0.8
  text "OPPO" at 46.482,26.289 h0.8
  text "A1" at 55.245,26.289 h0.8
  text "24V0" at 58.039,26.289 h0.8
  text "+24V" at 62.23,26.289 h0.8
  text "CLOSE" at 72.009,26.289 h0.8
  text "OPEN" at 76.708,26.289 h0.8
  text "A2" at 85.217,26.289 h0.8
  text "24V0" at 88.392,26.289 h0.8
  text "B1" at 51.435,26.254 h0.8
  text "+24V" at 92.71,26.162 h0.8
  text "RST" at 8.763,25.527 h0.8
  text "+24V" at 8.509,21.59 h0.8
  text "OPC1" at 8.509,17.78 h0.8
  text "OPC2" at 8.636,13.843 h0.8
  text "SON" at 8.636,9.779 h0.8
  text "CLR" at 8.636,5.842 h0.8
  text "PULS" at 8.509,2.032 h0.8
  text "SIGN" at 8.509,-2.032 h0.8
  text "DA+" at 8.636,-6.096 h0.8
  text "DA-" at 8.636,-10.033 h0.8
  text "ALM+" at 8.509,-13.97 h0.8
  text "BRK+" at 8.509,-17.907 h0.8
  text "ALM-" at 8.636,-21.971 h0.8
  text "+24V" at 54.356,-25.654 h0.8
  text "BRK-" at 8.636,-25.781 h0.8
  text "Willach Heise" at 105.41,-25.908 h0.8
  text "DC24V0" at 98.933,-26.035 h0.8
  text "SF2+" at 58.166,-26.162 h0.8
  text "SF1+" at 62.484,-26.162 h0.8
  text "SF1-" at 66.421,-26.162 h0.8
  text "SF2+" at 70.231,-26.162 h0.8
  text "SF2-" at 74.168,-26.162 h0.8
  text "EDM+" at 78.232,-26.162 h0.8
  text "EDM-" at 82.55,-26.162 h0.8
  text "+24V" at 86.614,-26.162 h0.8
  text "24V0" at 90.678,-26.162 h0.8
  text "DC24V" at 94.488,-26.162 h0.8
  text "Drug Delivery Control_V11.32" at 106.172,-27.432 h0.8
  text "2017-02-10" at 108.458,-28.956 h0.8
  text "24V0" at 8.636,-29.845 h0.8
Bottom Overlay:
  circle w0.254: c18.542,32.385 r1.5
  circle w0.254: c9.017,-33.528 r1.5
  circle w0.254: c122.936,-30.48 r1.5
  circle w0.254: c121.666,32.893 r1.5
Mechanical 1:
  lines w0.1: 0,-35.25 0,35.25 ; 0,35.306 130.048,35.306 130.048,-35.35 0.001,-35.303

## Text inside footprints (layer, text, board x,y; h text height)
C1: Top Overlay "+" at 37.973,-25.019 h2 r180
C3: Top Overlay "+" at 53.34,-16.51 h2 r270
C5: Top Overlay "+" at 74.168,-13.081 h2 r270
C7: Top Overlay "+" at 98.044,-23.622 h2 r90
Q4: Bottom Overlay "S" at 57.912,-12.735 h0.8; Bottom Overlay "D" at 60.198,-12.735 h0.8; Bottom Overlay "G" at 62.484,-12.735 h0.8
Q5: Bottom Overlay "S" at 57.912,6.569 h0.8; Bottom Overlay "D" at 60.198,6.569 h0.8; Bottom Overlay "G" at 62.484,6.569 h0.8
Q6: Bottom Overlay "S" at 44.704,6.569 h0.8; Bottom Overlay "D" at 46.99,6.569 h0.8; Bottom Overlay "G" at 49.276,6.569 h0.8
Q7: Bottom Overlay "S" at 43.18,-12.827 h0.8; Bottom Overlay "D" at 46.99,-12.735 h0.8; Bottom Overlay "G" at 49.276,-12.735 h0.8
Q8: Bottom Overlay "S" at 84.201,-12.608 h0.8; Bottom Overlay "D" at 86.487,-12.608 h0.8; Bottom Overlay "G" at 88.773,-12.608 h0.8
Q9: Bottom Overlay "S" at 84.328,6.569 h0.8; Bottom Overlay "D" at 86.614,6.569 h0.8; Bottom Overlay "G" at 88.9,6.569 h0.8
Q10: Bottom Overlay "S" at 71.12,6.569 h0.8; Bottom Overlay "D" at 73.406,6.569 h0.8; Bottom Overlay "G" at 75.692,6.569 h0.8
Q11: Bottom Overlay "S" at 70.993,-12.735 h0.8; Bottom Overlay "D" at 74.168,-12.7 h0.8; Bottom Overlay "G" at 75.565,-12.735 h0.8